# Altium PCB Fatma Jadoon Bootcamp.PcbDoc
Units mil, origin at the board's own origin, x right, y up, seen from the top; angles counter-clockwise.
Board outline 790 x 580 mil, 2 copper layers (Top Layer, Bottom Layer); 7 components, 4 nets, 17 pads, 21 vias.
Unrouted connection lines stored in the file: 1.
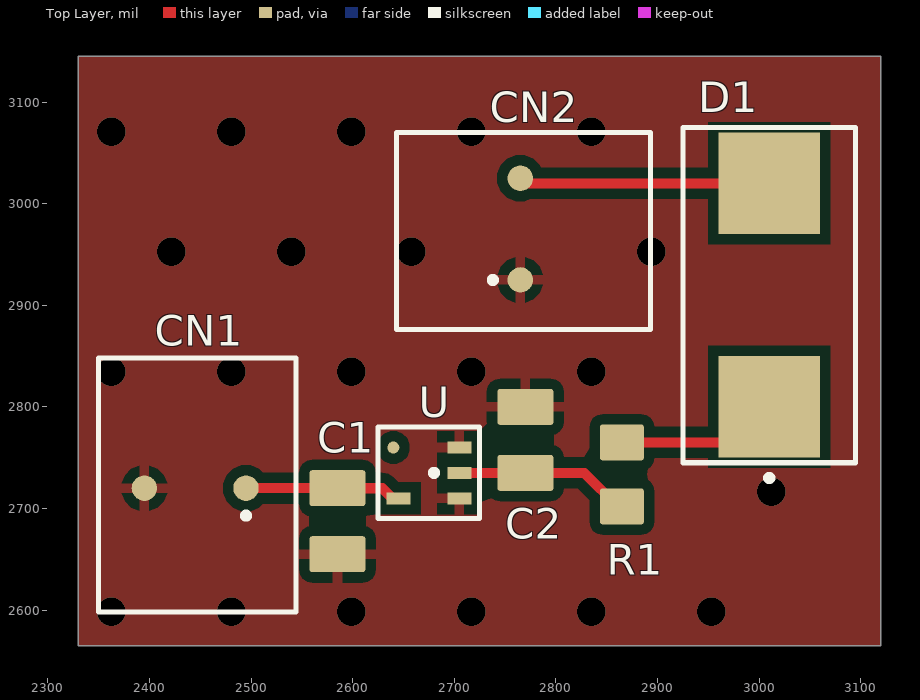
[diagram p0: Top Layer view]
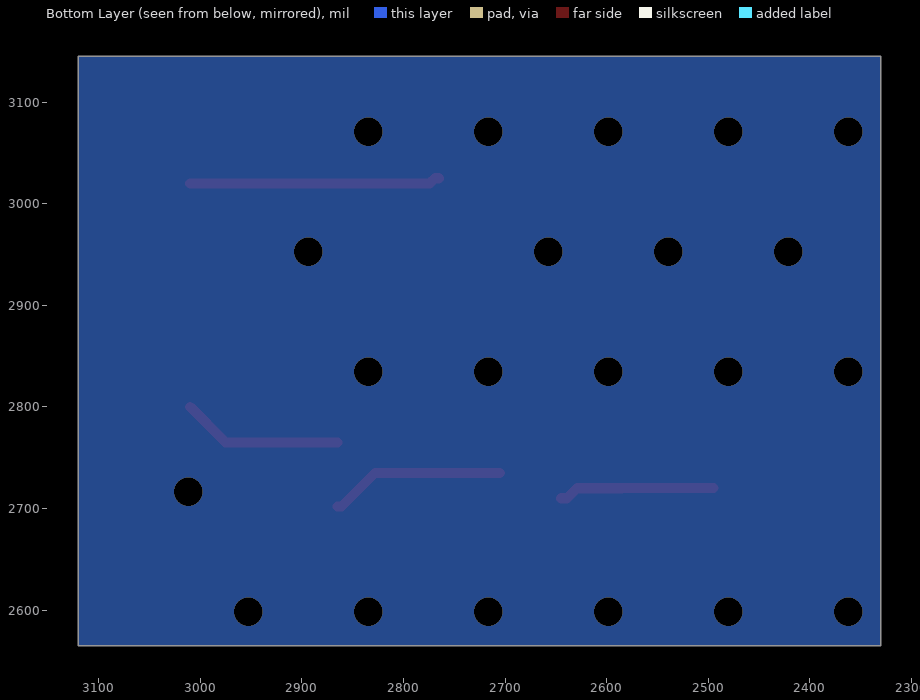
[diagram p1: Bottom Layer view, seen from below]
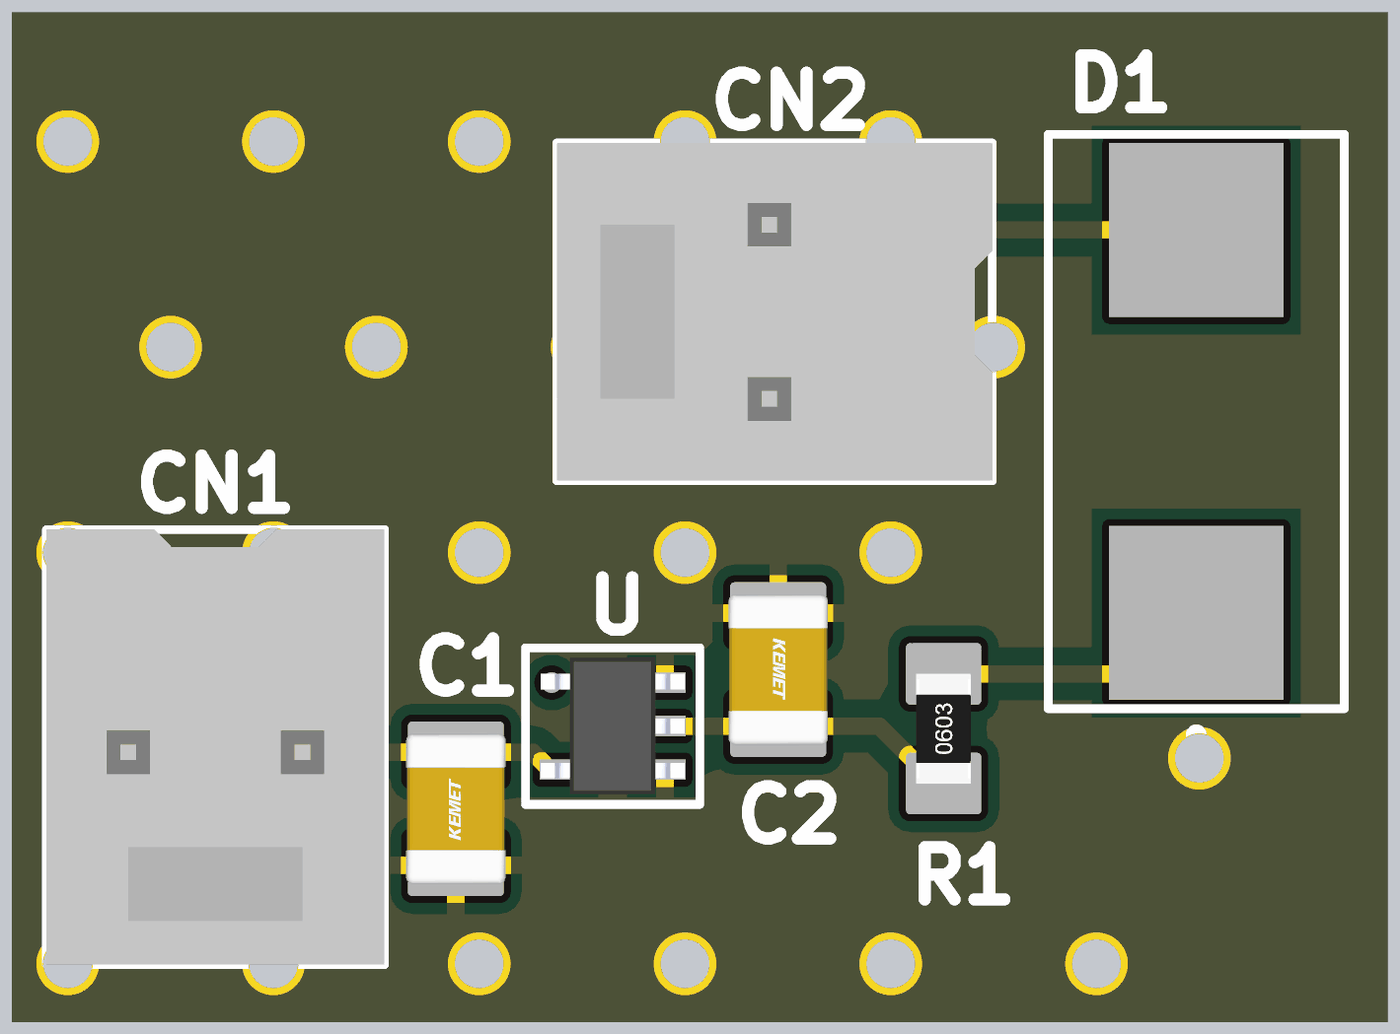
[diagram p2: 3D render of the assembled board from above, using the file's embedded part models]

## Layer stack, top to bottom
Top Solder: solder mask 0.4, Solder Resist, Dk 3.5
Top Layer: signal copper 1.4
Dielectric 1: dielectric 12.6, FR-4, Dk 4.8
Bottom Layer: signal copper 1.4
Bottom Solder: solder mask 0.4, Solder Resist, Dk 3.5

## Board outline
2330,2565 2330,3145 3120,3145 3120,2565

## Design rules (kind name [scope] priority, off if disabled: settings)
Clearance [All] p1: gap=10 ignorepadtopadclearanceinfootprint=FALSE
PolygonConnect [All] p1: connectstyle=Relief reliefconductorwidth=10 reliefentries=4 polygonreliefangle="90 Angle" airgapwidth=10
RoutingVias [All] p1: holewidth=28 width=50 viastyle="Through Hole" minholewidth=28 minwidth=50 maxholewidth=28 maxwidth=50
SolderMaskExpansion [All] p1: expansion=4 istentingtop=FALSE
SupplyNets "Schematic Supply Nets" [InNet('GND')] p1: voltage=0.000
SupplyNets "Schematic Supply Nets_2" [InNet('4V')] p2: voltage=0.000
SupplyNets "Schematic Supply Nets_1" [InNet('5V')] p3: voltage=0.000
Width [All] p1: maxlimit=10 minlimit=10 preferedwidth=10
30 further rules are at their usual default settings.

## Components (designator, comment, footprint, x,y, rotation, side; value= is the part's Value field where it differs from the comment)
C1 "GCM21BR71E105KA56L_1" CAP0805 2585,2687.48 r90 top value=1μF
C2 "GCM21BR71E105KA56L_1" CAP0805 2770,2767.48 r270 top value=1μF
CN1 "0022232021" 900-0022232021-ND 2445,2722.95 r180 top
CN2 "0022232021" 900-0022232021-ND 2767.95,2975 r90 top
D1 "LTST-C190KFKT" "0603 (1608 Metric)" 3010,2910 r90 top
R1 "RC0603JR-0768RL" RES0603 2865,2733.5 r90 top value=68Ω
U "MIC5365-1.8YC5-TR" 576-3181-6-ND 2795,2595 r90 top

## Footprints (in the part's own frame and the unit in brackets; to place one, negate y for a bottom-side part, rotate by r counter-clockwise, add the part's x,y. Pads: shape width x height; smd on the part's side, far side on the other; paste and mask are expansions set on the pad)
576-3181-6-ND [mm] "IC REG LINEAR 1.8V 150MA SC-70-5"
  rect 0.3x0.6 smd: 1(3.556,2.286) 2(2.921,2.286) 2(4.191,2.286) 4(2.921,3.81)
  round 0.3 smd: 3(4.191,3.937)
  silkscreen extent 2.41,1.78 4.7,4.32, body extent 2.56,2 4.56,4.1, height 1.11
"0603 (1608 Metric)" [mil]
  rect 100x100 smd: 1(-110,0) 2(110,0)
  silkscreen extent -181,-85 165,85, body extent -160,-85 160,85, height 31
900-0022232021-ND [mm] "CONN HEADER VERT 2POS 2.54MM"
  round 0.635 smd: 1(-1.27,0.075) 2(1.27,0.075)
  silkscreen extent -2.51,-3.18 2.41,3.18, body extent -2.51,-3.18 2.41,3.18, height 14.24
CAP0805 [mm] "Chip Capacitor, Body 2.0x1.2mm, Height 0.45mm, IPC Medium Density"
  rrect15% 0.9x1.4 smd: 1(-0.825,0) 2(0.825,0)
  body extent -1.1,-0.73 1.1,0.72, height 1.39
RES0603 [mm] "Chip Resistor, Body 1.6x0.8mm, IPC Medium Density"
  rrect15% 0.9x1.1 smd: 1(-0.8,0) 2(0.8,0)
  body extent -0.8,-0.4 0.8,0.4, height 0.46

## Part data
C1 C2: "CAP CER 1PF 50V C0G/NP0 0402", Manufacturer 1=Murata, Manufacturer Part Number 1=GJM1555C1H1R0WB01, Supplier Part Number 1=81-GJM1555C1H1R0WB1D, Voltage Rating=50V, Supplier 1=Mouser
CN1 CN2: "CONN HEADER VERT 2POS 2.54MM", Manufacturer 1=Molex, Supplier Part Number 1=900-0022232021-ND, Manufacturer Part Number 1=0022232021, Supplier 1=DigiKey
D1: "ED ORANGE CLEAR CHIP SMD", Manufacturer 1="Lite-On Inc.", Supplier Part Number 1=160-1434-1-ND, Manufacturer Part Number 1=LTST-C190KFKT, Supplier 1=DigiKey
R1: "RES 68 OHM 5% 1/10W 0603", Manufacturer 1=YAGEO, Power Rating=1/10W, Supplier Part Number 1=311-68GRCT-ND, Manufacturer Part Number 1=RC0603JR-0768RL, Supplier 1=Digi-Key
U: "IC REG LINEAR 1.8V 150MA SC-70-5", Manufacturer 1="Microchip Technology", Manufacturer Part Number 1=*MIC5365-1.8YC5-TR

## Via types
v1: diameter 28, hole 28, Top Layer to Bottom Layer, 21 vias

## Nets (pads, with @x,y where several pads share a name; then routed paths per layer and width w, separated by ;. In a path a pad name is that pad's centre, name@x,y a point inside that pad or via, vN(x,y) a via of type N, cw(c..) or ccw(c..) an arc to the next point about the centre after c; other vN are vias at no path point)
4V: C2.2 CN2.2 D1.2 R1.1 U.1 | length 420.7
  Top Layer w10: U.1 C2.2 2828.07,2735 2861.06,2702.01 R1.1 ; CN2.2 2769.06,3025 2774.06,3020 D1.2
5V: C1.2 CN1.1 U.4 | length 154.1
  Top Layer w10: CN1.1 C1.2 C1.2 2629.13,2719.96 2639.09,2710 U.4
GND: C1.1 C2.1 CN1.2 CN2.1 U.2
  other v1: 2362.2,2598.42 2480.31,2598.42 2598.42,2598.42 2716.53,2598.42 2834.64,2598.42 2952.76,2598.42 3011.81,2716.53 2362.2,2834.64 2480.31,2834.64 2598.42,2834.64 2716.53,2834.64 2834.64,2834.64 2421.26,2952.76 2539.37,2952.76 2657.48,2952.76 2893.7,2952.76 2362.2,3070.87 2480.31,3070.87 2598.42,3070.87 2716.53,3070.87 2834.64,3070.87
NetD1_1: D1.1 R1.2 | length 159.5
  Top Layer w10: R1.2 2975,2765 D1.1
pads on no net: U.3

## Polygon pours and split planes (outlines as drawn)
GND on Bottom Layer "GND_L02_P000" (solid, pour order 0): 2330,3145 2330,2565 3120,2565 3120,3145
GND on Top Layer "GND_L01_P001" (solid, pour order 1): 2330,3145 2330,2565 3120,2565 3120,3145

## Silkscreen, mask and mechanical layers (free items; w line width, h text height)
Mechanical 1:
  lines w5: 2330,3145 3120,3145 3120,3140 3120,2565
Mechanical 9:
  lines w5: 2330,3145 2330,2565 3060,2565 3120,2565 ; 5350,2695 5355,2690